# Altium PCB PCB_PCIe TX to RX.pcbdoc
Units mil, origin at the board's own origin, x right, y up, seen from the top; angles counter-clockwise.
Board outline 6470 x 3393.18 mil, 2 copper layers (Top Layer, Bottom Layer); 1 components, 132 nets, 166 pads, 0 vias.
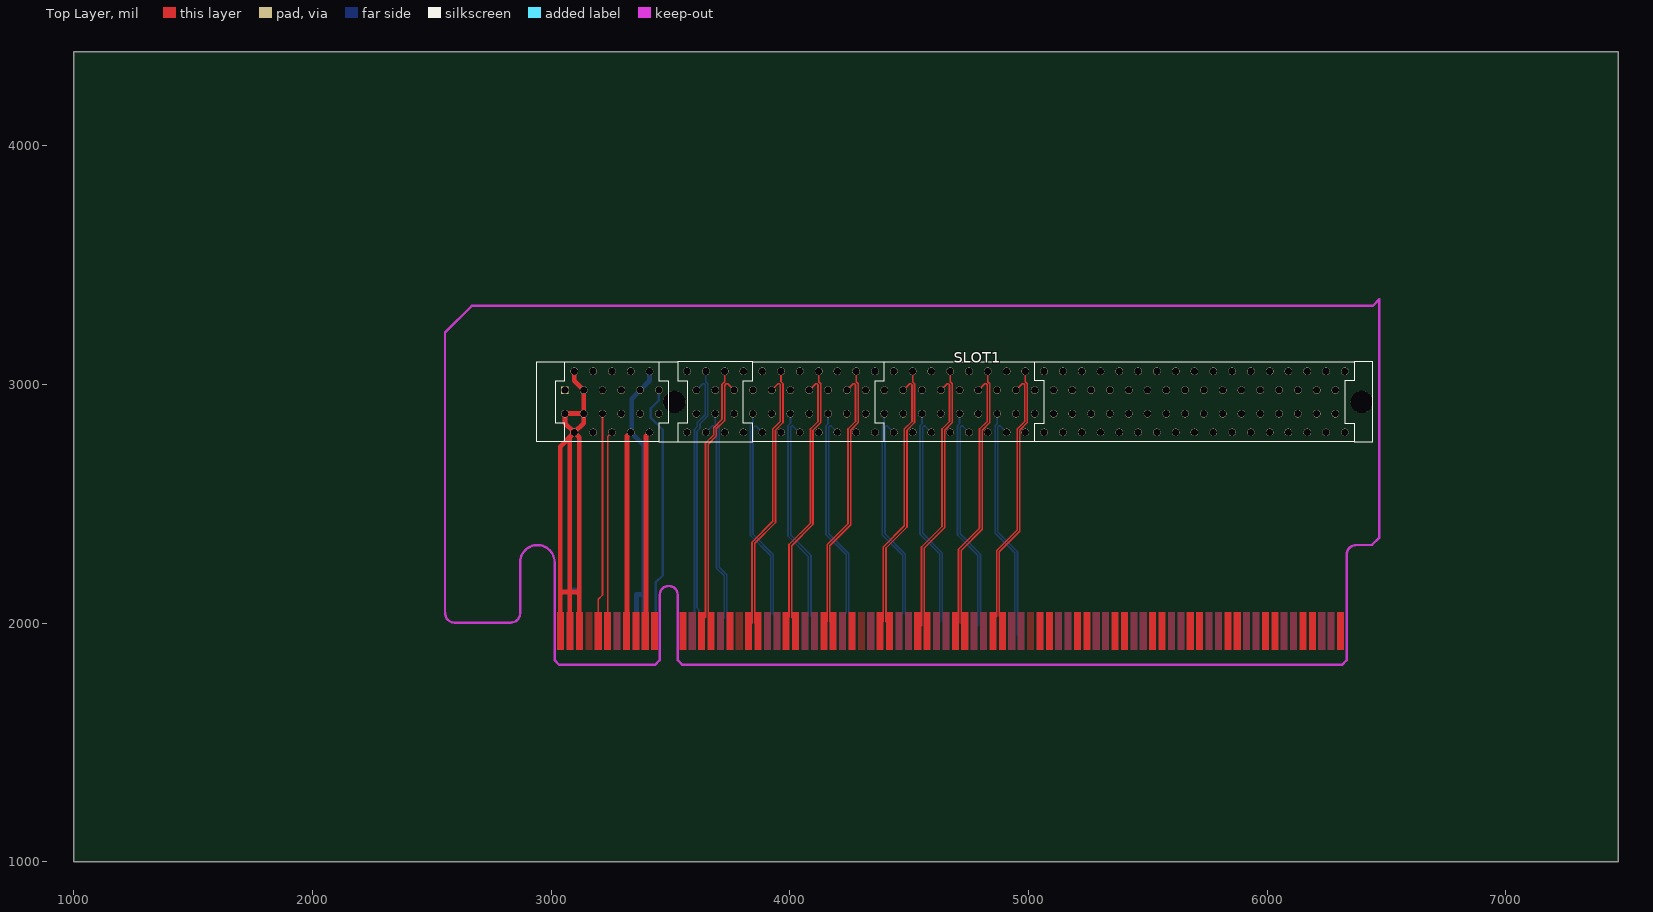
[diagram p0: Top Layer view]
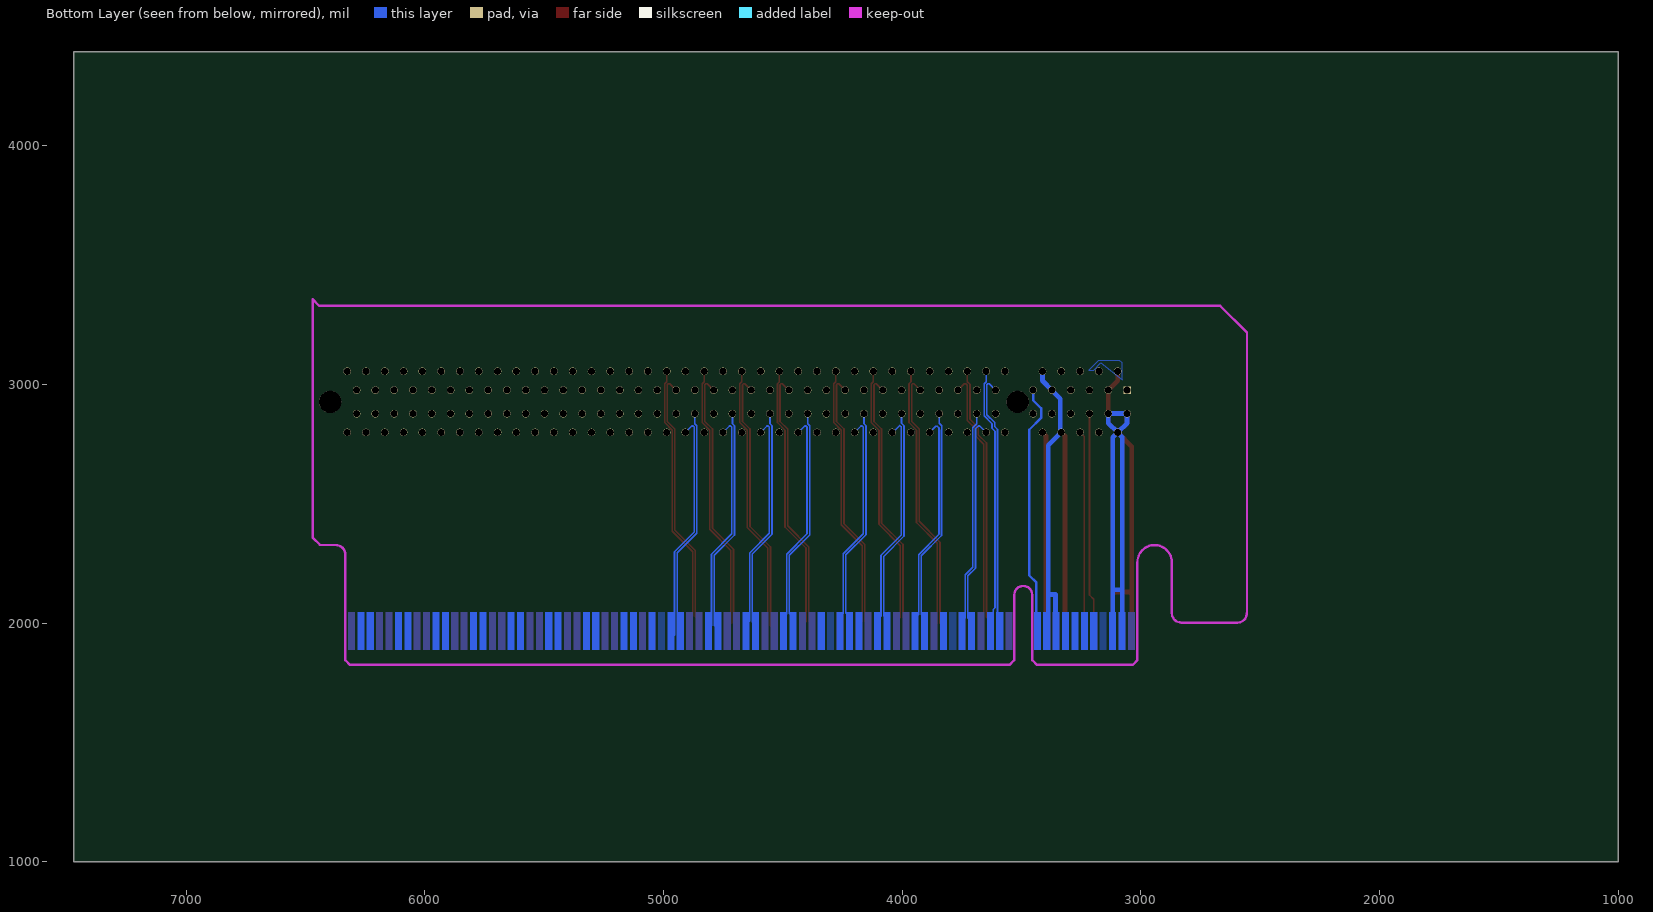
[diagram p1: Bottom Layer view, seen from below]

## Layer stack, top to bottom
Top Layer: signal copper (thickness not stored)
Dielectric: dielectric 12.6, FR-4, Dk 4.8
Bottom Layer: signal copper (thickness not stored)

## Board outline
7470,1000 1000,1000 1000,4393.18 7470,4393.18

## Components (designator, comment, footprint, x,y, rotation, side; value= is the part's Value field where it differs from the comment)
SLOT1 "GF_PCIe x16" "PCIE X16 SLOT" 4107.31,2894.25 r0 top

## Footprints (in the part's own frame and the unit in brackets; to place one, negate y for a bottom-side part, rotate by r counter-clockwise, add the part's x,y. Pads: shape width x height; smd on the part's side, far side on the other; paste and mask are expansions set on the pad)
"PCIE X16 SLOT" [mm]
  rect 0.8x0.8 hole 0.7 slot 0.705 at 0 deg: A1(-26.67,2.08)
  round 0.8 hole 0.7 slot 0.705 at 0 deg: A2(-25.67,4.08) A3(-24.67,2.08) A4(-23.67,4.08) A5(-22.67,2.08) A6(-21.67,4.08) A7(-20.67,2.08) A8(-19.67,4.08) A9(-18.67,2.08) A10(-17.67,4.08) A11(-16.67,2.08) A12(-13.67,4.08) A13(-12.67,2.08) A14(-11.67,4.08) A15(-10.67,2.08) A16(-9.67,4.08) A17(-8.67,2.08) A18(-7.67,4.08) A19(-6.67,2.08) A20(-5.67,4.08) A21(-4.67,2.08) A22(-3.67,4.08) A23(-2.67,2.08) A24(-1.67,4.08) A25(-0.67,2.08) A26(0.33,4.08) A27(1.33,2.08) A28(2.33,4.08) A29(3.33,2.08) A30(4.33,4.08) A31(5.33,2.08) A32(6.33,4.08) A33(7.33,2.08) A34(8.33,4.08) A35(9.33,2.08) A36(10.33,4.08) A37(11.33,2.08) A38(12.33,4.08) A39(13.33,2.08) A40(14.33,4.08) A41(15.33,2.08) A42(16.33,4.08) A43(17.33,2.08) A44(18.33,4.08) A45(19.33,2.08) A46(20.33,4.08) A47(21.33,2.08) A48(22.33,4.08) A49(23.33,2.08) A50(24.33,4.08) A51(25.33,2.08) A52(26.33,4.08) A53(27.33,2.08) A54(28.33,4.08) A55(29.33,2.08) A56(30.33,4.08) A57(31.33,2.08) A58(32.33,4.08) A59(33.33,2.08) A60(34.33,4.08) A61(35.33,2.08) A62(36.33,4.08) A63(37.33,2.08) A64(38.33,4.08) A65(39.33,2.08) A66(40.33,4.08) A67(41.33,2.08) A68(42.33,4.08) A69(43.33,2.08) A70(44.33,4.08) A71(45.33,2.08) A72(46.33,4.08) A73(47.33,2.08) A74(48.33,4.08) A75(49.33,2.08) A76(50.33,4.08) A77(51.33,2.08) A78(52.33,4.08) A79(53.33,2.08) A80(54.33,4.08) A81(55.33,2.08) A82(56.33,4.08) B1(-26.67,-0.42) B2(-25.67,-2.42) B3(-24.67,-0.42) B4(-23.67,-2.42) B5(-22.67,-0.42) B6(-21.67,-2.42) B7(-20.67,-0.42) B8(-19.67,-2.42) B9(-18.67,-0.42) B10(-17.67,-2.42) B11(-16.67,-0.42) B12(-13.67,-2.42) B13(-12.67,-0.42) B14(-11.67,-2.42) B15(-10.67,-0.42) B16(-9.67,-2.42) B17(-8.67,-0.42) B18(-7.67,-2.42) B19(-6.67,-0.42) B20(-5.67,-2.42) B21(-4.67,-0.42) B22(-3.67,-2.42) B23(-2.67,-0.42) B24(-1.67,-2.42) B25(-0.67,-0.42) B26(0.33,-2.42) B27(1.33,-0.42) B28(2.33,-2.42) B29(3.33,-0.42) B30(4.33,-2.42) B31(5.33,-0.42) B32(6.33,-2.42) B33(7.33,-0.42) B34(8.33,-2.42) B35(9.33,-0.42) B36(10.33,-2.42) B37(11.33,-0.42) B38(12.33,-2.42) B39(13.33,-0.42) B40(14.33,-2.42) B41(15.33,-0.42) B42(16.33,-2.42) B43(17.33,-0.42) B44(18.33,-2.42) B45(19.33,-0.42) B46(20.33,-2.42) B47(21.33,-0.42) B48(22.33,-2.42) B49(23.33,-0.42) B50(24.33,-2.42) B51(25.33,-0.42) B52(26.33,-2.42) B53(27.33,-0.42) B54(28.33,-2.42) B55(29.33,-0.42) B56(30.33,-2.42) B57(31.33,-0.42) B58(32.33,-2.42) B59(33.33,-0.42) B60(34.33,-2.42) B61(35.33,-0.42) B62(36.33,-2.42) B63(37.33,-0.42) B64(38.33,-2.42) B65(39.33,-0.42) B66(40.33,-2.42) B67(41.33,-0.42) B68(42.33,-2.42) B69(43.33,-0.42) B70(44.33,-2.42) B71(45.33,-0.42) B72(46.33,-2.42) B73(47.33,-0.42) B74(48.33,-2.42) B75(49.33,-0.42) B76(50.33,-2.42) B77(51.33,-0.42) B78(52.33,-2.42) B79(53.33,-0.42) B80(54.33,-2.42) B81(55.33,-0.42) B82(56.33,-2.42)
  round 2.35 hole 2.35 slot 2.355 at 0 deg unplated: ""(-15.02,0.83) ""(58.13,0.83)
  silkscreen extent -29.67,-3.42 59.33,5.08

## Nets (pads, with @x,y where several pads share a name; then routed paths per layer and width w, separated by ;. In a path a pad name is that pad's centre, name@x,y a point inside that pad or via, vN(x,y) a via of type N, cw(c..) or ccw(c..) an arc to the next point about the centre after c; other vN are vias at no path point)
+3.3V: SLOT1.A9 SLOT1.A10 SLOT1.B8 | length 2094.1
  Top Layer w20: 3317.31,1980 3317.31,2783.38 SLOT1.B8
  Bottom Layer w20: 3357.31,2000 3357.31,2120 3387.31,2120 3387.31,2020 ; 3387.31,2091.33 3387.31,2744.56 SLOT1.B8 3337.31,2803.38 3337.31,2940 3372.27,2974.96 SLOT1.A9 3411.64,3015.51 SLOT1.A10
+3.3VAUX: SLOT1.B10 | length 804.9
  Top Layer w20: 3397.31,2000 3397.31,2784.64 SLOT1.B10
+12V: SLOT1.A2 SLOT1.A3 SLOT1.B1 SLOT1.B2 SLOT1.B3 | length 4902
  Top Layer w20: 3037.31,2010 3037.31,2120 ; 3077.31,2000 3077.78,2130 ; 3077.34,2130 3077.34,2779.63 SLOT1.B2 ; SLOT1.A2 3096.68,3015.51 SLOT1.A3 SLOT1.B3 ; 3117.31,2000 3117.31,2120 ; 3037.31,2120 3037.31,2739.6 SLOT1.B2 ; 3037.31,2120 3047.31,2130 3107.31,2130 3117.31,2120 ; SLOT1.B2 3057.31,2838.34 SLOT1.B1 SLOT1.B3 ; SLOT1.B2 3136.05,2838.34 SLOT1.B3 ; SLOT1.B2 3117.31,2778.34 3117.31,2120
  Bottom Layer w20: 3077.31,2000 3077.31,2140 ; 3117.31,2000 3117.31,2140 ; 3077.31,2140 3077.31,2779.6 SLOT1.B2 ; 3077.31,2140 3117.31,2140 ; SLOT1.B2 3117.31,2778.34 3117.31,2140 ; SLOT1.B2 3057.31,2838.34 SLOT1.B1 SLOT1.B3 3136.05,2838.34 SLOT1.B2
GND: SLOT1.A1 SLOT1.A4 SLOT1.A12 SLOT1.A15 SLOT1.A18 SLOT1.A20 SLOT1.A23 SLOT1.A24 SLOT1.A27 SLOT1.A31 SLOT1.A33 SLOT1.A34 SLOT1.A37 SLOT1.A38 SLOT1.A41 SLOT1.A42 SLOT1.A45 SLOT1.A46 SLOT1.A49 SLOT1.A51 SLOT1.A54 SLOT1.A55 SLOT1.A58 SLOT1.A59 SLOT1.A62 SLOT1.A63 SLOT1.A66 SLOT1.A67 SLOT1.A70 SLOT1.A71 SLOT1.A74 SLOT1.A75 SLOT1.A78 SLOT1.A79 SLOT1.A82 SLOT1.B4 SLOT1.B7 SLOT1.B13 SLOT1.B16 SLOT1.B18 SLOT1.B21 SLOT1.B22 SLOT1.B25 SLOT1.B26 SLOT1.B29 SLOT1.B31 SLOT1.B32 SLOT1.B35 SLOT1.B36 SLOT1.B39 SLOT1.B40 SLOT1.B43 SLOT1.B44 SLOT1.B47 SLOT1.B48 SLOT1.B49 SLOT1.B52 SLOT1.B53 SLOT1.B56 SLOT1.B57 SLOT1.B60 SLOT1.B61 SLOT1.B64 SLOT1.B65 SLOT1.B68 SLOT1.B69 SLOT1.B72 SLOT1.B73 SLOT1.B76 SLOT1.B77 SLOT1.B80 SLOT1.B81
HSIN_0-: SLOT1.A17 | length 1074.4
  Top Layer w7: 3672.31,2010 3657.31,2025 3657.31,2750 3691.2,2783.89 3691.2,2813.89 3726.35,2849.04 3726.35,2995.96 3733.35,3002.96 3739.15,3002.96 SLOT1.A17
HSIN_1-: SLOT1.A22 | length 1107.6
  Top Layer w7: 3852.31,2000 3852.31,2334.44 3939.57,2421.7 3939.57,2808.61 3971.16,2840.2 3971.16,3003.41 3962.82,3011.76 SLOT1.A22
HSIN_2-: SLOT1.A26 | length 1097.7
  Top Layer w7: 4017.31,2015 4007.31,2025 4007.31,2324.44 4097.05,2414.18 4097.05,2808.61 4128.64,2840.2 4128.64,3003.41 4120.3,3011.76 SLOT1.A26
HSIN_3-: SLOT1.A30 | length 1102.6
  Top Layer w7: 4167.31,2005 4167.31,2324.44 4254.53,2411.66 4254.53,2808.61 4286.12,2840.2 4286.12,3003.41 4277.78,3011.76 SLOT1.A30
HSIN_4-: SLOT1.A36 | length 1103.1
  Top Layer w7: 4402.31,2005 4402.31,2314.44 4490.75,2402.89 4490.75,2808.61 4522.34,2840.2 4522.34,3003.41 4514,3011.76 SLOT1.A36
HSIN_5-: SLOT1.A40 | length 1117
  Top Layer w7: 4562.31,1990 4562.31,2314.44 4648.23,2400.36 4648.23,2808.61 4679.82,2840.2 4679.82,3003.41 4671.48,3011.76 SLOT1.A40
HSIN_6-: SLOT1.A44 | length 1129.3
  Top Layer w7: 4732.31,1985 4717.31,2000 4717.31,2304.44 4805.71,2392.85 4805.71,2808.61 4837.31,2840.2 4837.31,3003.41 4828.96,3011.76 SLOT1.A44
HSIN_7-: SLOT1.A48 | length 1098.2
  Top Layer w7: 4892.31,2015 4877.31,2030 4877.31,2299.44 4963.19,2385.33 4963.19,2808.61 4994.78,2840.2 4994.78,3003.41 4986.44,3011.76 SLOT1.A48
HSIN_8-: 
HSIN_9-: 
HSIN_10-: 
HSIN_11-: 
HSIN_12-: 
HSIN_13-: 
HSIN_14-: 
HSIN_15-: 
HSIP_0+: SLOT1.A16 | length 1076.9
  Top Layer w7: 3637.31,2015 3646.31,2024 3646.31,2754.56 3680.2,2788.45 3680.2,2818.45 3715.35,2853.6 3715.35,3000.51 3726.6,3011.76 SLOT1.A16
HSIP_1+: SLOT1.A21 | length 1097.6
  Top Layer w7: 3841.31,2000 3841.31,2339 3928.57,2426.26 3928.57,2813.16 3960.16,2844.75 3960.16,2998.86 3956.06,3002.96 3950.26,3002.96 SLOT1.A21
HSIP_2+: SLOT1.A25 | length 1073.6
  Top Layer w7: 3996.31,2025 3996.31,2329 4086.05,2418.74 4086.05,2813.16 4117.64,2844.75 4117.64,2998.86 4113.54,3002.96 4107.74,3002.96 SLOT1.A25
HSIP_3+: SLOT1.A29 | length 1092.6
  Top Layer w7: 4156.31,2005 4156.31,2329 4243.53,2416.22 4243.53,2813.16 4275.12,2844.75 4275.12,2998.86 4271.02,3002.96 4265.22,3002.96 SLOT1.A29
HSIP_4+: SLOT1.A35 | length 1093.1
  Top Layer w7: 4391.31,2005 4391.31,2319 4479.75,2407.44 4479.75,2813.16 4511.34,2844.75 4511.34,2998.86 4507.24,3002.96 4501.44,3002.96 SLOT1.A35
HSIP_5+: SLOT1.A39 | length 1107.1
  Top Layer w7: 4551.31,1990 4551.31,2319 4637.23,2404.92 4637.23,2813.16 4668.82,2844.75 4668.82,2998.86 4664.72,3002.96 4658.93,3002.96 SLOT1.A39
HSIP_6+: SLOT1.A43 | length 1098.1
  Top Layer w7: 4706.31,2000 4706.31,2309 4794.71,2397.4 4794.71,2813.16 4826.31,2844.75 4826.31,2998.86 4822.2,3002.96 4816.41,3002.96 SLOT1.A43
HSIP_7+: SLOT1.A47 | length 1087.8
  Top Layer w7: 4852.31,2015 4866.31,2029 4866.31,2304 4952.19,2389.88 4952.19,2813.16 4983.78,2844.75 4983.78,2998.86 4979.69,3002.96 4973.89,3002.96 SLOT1.A47
HSIP_8+: 
HSIP_9+: 
HSIP_10+: 
HSIP_11+: 
HSIP_12+: 
HSIP_13+: 
HSIP_14+: 
HSIP_15+: 
HSON_0-: SLOT1.B15 | length 892.6
  Bottom Layer w7: SLOT1.B15 3687.23,2834.59 3703.35,2818.47 3703.35,2234.52 3735.42,2202.45 3735.42,2021.89 3747.31,2010
HSON_1-: SLOT1.B20 | length 884.9
  Bottom Layer w7: SLOT1.B20 3858.32,2824.73 3852.52,2824.73 3845.59,2817.79 3845.59,2371.72 3930.51,2286.8 3930.51,2036.8 3942.31,2025
HSON_2-: SLOT1.B24 | length 901.2
  Bottom Layer w7: SLOT1.B24 4038.34,2798.97 4009.17,2828.14 4003.07,2822.03 4003.07,2369.24 4088.41,2283.9 4088.41,2028.9 4102.31,2015
HSON_3-: SLOT1.B28 | length 880.6
  Bottom Layer w7: SLOT1.B28 4172.22,2825.79 4166.42,2825.79 4162.32,2821.69 4162.32,2374.99 4246.61,2290.7 4246.61,2040.7 4257.31,2030
HSON_4-: SLOT1.B34 | length 894.2
  Bottom Layer w7: SLOT1.B34 4408.44,2825.79 4402.64,2825.79 4398.54,2821.69 4398.54,2373.77 4483.31,2289 4483.31,2039 4502.31,2020
HSON_5-: SLOT1.B38 | length 909
  Bottom Layer w7: SLOT1.B38 4565.92,2825.79 4560.12,2825.79 4556.02,2821.69 4556.02,2376.29 4638.31,2294 4638.31,2009 4647.31,2000
HSON_6-: SLOT1.B42 | length 916.3
  Bottom Layer w7: SLOT1.B42 4723.4,2825.79 4717.6,2825.79 4713.5,2821.69 4713.5,2373.81 4798.31,2289 4798.31,1990
HSON_7-: SLOT1.B46 | length 955.3
  Bottom Layer w7: SLOT1.B46 4880.88,2825.79 4875.09,2825.79 4870.98,2821.69 4870.98,2381.32 4953.31,2299 4953.31,1950
HSON_8-: 
HSON_9-: 
HSON_10-: 
HSON_11-: 
HSON_12-: 
HSON_13-: 
HSON_14-: 
HSON_15-: 
HSOP_0+: SLOT1.B14 | length 875.7
  Bottom Layer w7: SLOT1.B14 3674.67,2825.79 3680.47,2825.79 3692.35,2813.91 3692.35,2229.96 3724.42,2197.89 3724.42,2022.11 3717.31,2015
HSOP_1+: SLOT1.B19 | length 890.2
  Bottom Layer w7: SLOT1.B19 3844.71,2836.71 3834.42,2826.43 3834.42,2809.03 3834.59,2808.87 3834.59,2367.17 3919.51,2282.24 3919.51,2037.2 3912.31,2030
HSOP_2+: SLOT1.B23 | length 894.5
  Bottom Layer w7: SLOT1.B23 4002.19,2836.71 3991.9,2826.43 3991.9,2809.03 3992.07,2808.87 3992.07,2364.69 4077.41,2279.34 4077.41,2030.1 4072.31,2025
HSOP_3+: SLOT1.B27 | length 884.5
  Bottom Layer w7: SLOT1.B27 4159.67,2834.59 4151.32,2826.25 4151.32,2370.43 4235.61,2286.15 4235.61,2043.3 4227.31,2035
HSOP_4+: SLOT1.B33 | length 897.5
  Bottom Layer w7: SLOT1.B33 4395.89,2834.59 4387.54,2826.25 4387.54,2369.21 4472.31,2284.44 4472.31,2040 4457.31,2025
HSOP_5+: SLOT1.B37 | length 924.4
  Bottom Layer w7: SLOT1.B37 4553.37,2834.59 4545.02,2826.25 4545.02,2371.73 4627.31,2289.44 4627.31,2005 4617.31,1995
HSOP_6+: SLOT1.B41 | length 926.3
  Bottom Layer w7: SLOT1.B41 4710.85,2834.59 4702.5,2826.25 4702.5,2369.25 4787.31,2284.44 4787.31,1990
HSOP_7+: SLOT1.B45 | length 965.3
  Bottom Layer w7: SLOT1.B45 4868.33,2834.59 4859.98,2826.25 4859.98,2376.77 4942.31,2294.44 4942.31,1950
HSOP_8+: 
HSOP_9+: 
HSOP_10+: 
HSOP_11+: 
HSOP_12+: 
HSOP_13+: 
HSOP_14+: 
HSOP_15+: 
PERST#: SLOT1.A11 | length 1013.2
  Bottom Layer w10: 3437.31,2010 3437.31,2170 3467.31,2200 3467.31,2810 3417.31,2860 3417.31,2900 3451.01,2933.7 SLOT1.A11
PIN1_A5: 
PIN1_A6: 
PIN1_A7: 
PIN1_A8: 
PIN1_A19: 
PIN1_A28: 
PIN1_A32: 
PIN1_A50: 
PIN1_B9: 
PIN1_B12: 
PIN1_B17: 
PIN1_B30: 
PIN1_B82: 
REFCLK+: SLOT1.A13 | length 1077.1
  Bottom Layer w7: 3600,1990 3600,2811.16 3612.34,2823.5 3612.34,2840.19 3645.2,2873.06 3645.2,2998.86 3641.11,3002.96 3635.31,3002.96 SLOT1.A13
REFCLK-: SLOT1.A14 | length 1097.8
  Bottom Layer w7: 3618.05,1982.22 3618.05,2056.59 3611,2063.64 3611,2803.47 3623.34,2815.81 3623.34,2835.64 3656.2,2868.51 3656.2,3003.41 3647.86,3011.76 SLOT1.A14
SLOT1_A5: SLOT1.A5
SLOT1_A6: SLOT1.A6
SLOT1_A7: SLOT1.A7
SLOT1_A8: SLOT1.A8
SLOT1_A19: SLOT1.A19
SLOT1_A28: SLOT1.A28
SLOT1_A32: SLOT1.A32
SLOT1_A50: SLOT1.A50
SLOT1_A52: SLOT1.A52
SLOT1_A53: SLOT1.A53
SLOT1_A56: SLOT1.A56
SLOT1_A57: SLOT1.A57
SLOT1_A60: SLOT1.A60
SLOT1_A61: SLOT1.A61
SLOT1_A64: SLOT1.A64
SLOT1_A65: SLOT1.A65
SLOT1_A68: SLOT1.A68
SLOT1_A69: SLOT1.A69
SLOT1_A72: SLOT1.A72
SLOT1_A73: SLOT1.A73
SLOT1_A76: SLOT1.A76
SLOT1_A77: SLOT1.A77
SLOT1_A80: SLOT1.A80
SLOT1_A81: SLOT1.A81
SLOT1_B9: SLOT1.B9
SLOT1_B12: SLOT1.B12
SLOT1_B17: SLOT1.B17
SLOT1_B30: SLOT1.B30
SLOT1_B50: SLOT1.B50
SLOT1_B51: SLOT1.B51
SLOT1_B54: SLOT1.B54
SLOT1_B55: SLOT1.B55
SLOT1_B58: SLOT1.B58
SLOT1_B59: SLOT1.B59
SLOT1_B62: SLOT1.B62
SLOT1_B63: SLOT1.B63
SLOT1_B66: SLOT1.B66
SLOT1_B67: SLOT1.B67
SLOT1_B70: SLOT1.B70
SLOT1_B71: SLOT1.B71
SLOT1_B74: SLOT1.B74
SLOT1_B75: SLOT1.B75
SLOT1_B78: SLOT1.B78
SLOT1_B79: SLOT1.B79
SLOT1_B82: SLOT1.B82
SMBDAT: SLOT1.B6 | length 785.9
  Top Layer w7: 3237.31,2020 3237.31,2782.12 SLOT1.B6
SMCLK: SLOT1.B5 | length 885
  Top Layer w7: 3197.31,2000 3197.31,2100 3214.79,2117.48 SLOT1.B5
WAKE#: SLOT1.B11
pads on no net: SLOT1.

## Polygon pours and split planes (outlines as drawn)
+12V on Bottom Layer (solid): 3077.31,3020 3077.31,3090 3087.31,3100 3177.31,3100 3217.31,3060 3197.31,3060 3167.31,3090
GND on Top Layer (solid): 2030,3820 6280,3820 6830,3270 6830,1790 6730,1690 1600,1690 1500,1790
GND on Bottom Layer (solid): 2300,3640 6830,3640 6970,3500 6970,1890 6580,1500 2490,1500 1750,2240

## Keep-outs
Keep-Out Layer:
  lines w10: 2555.31,2041.53 ccw(c2594.68,2041.53) 2594.68,2002.16 ; 2830.5,2002.16 ccw(c2830.5,2041.53) 2869.87,2041.53 ; 2869.87,2254.92 cw(c2941.92,2254.92) 3013.97,2254.92 ; 3454.91,2118.3 cw(c3492.31,2118.3) 3529.72,2118.3 ; 6332.87,2287.6 cw(c6372.24,2287.6) 6372.24,2326.97

## Other copper
Top Layer:
  region net +12V: 3025.8,1888.88 3053.36,1888.88 3053.36,2046.09 3025.8,2046.09
  region net +12V: 3065.18,1888.88 3092.74,1888.88 3092.74,2046.09 3065.18,2046.09
  region net +12V: 3104.55,1888.88 3132.11,1888.88 3132.11,2046.09 3104.55,2046.09
  region net SMCLK: 3183.28,1888.88 3210.84,1888.88 3210.84,2046.09 3183.28,2046.09
  region net SMBDAT: 3222.66,1888.88 3250.22,1888.88 3250.22,2046.09 3222.66,2046.09
  region net +3.3V: 3301.39,1888.88 3328.95,1888.88 3328.95,2046.09 3301.39,2046.09
  region net PIN1_B9: 3340.78,1888.88 3368.32,1888.88 3368.32,2046.09 3340.78,2046.09
  region net +3.3VAUX: 3380.14,1888.88 3407.7,1888.88 3407.7,2046.09 3380.14,2046.09
  region net WAKE#: 3419.51,1888.88 3447.07,1888.88 3447.07,2046.09 3419.51,2046.09
  region net PIN1_B12: 3537.62,1888.88 3565.18,1888.88 3565.18,2046.09 3537.62,2046.09
  region net HSIP_0+: 3616.36,1888.88 3643.91,1888.88 3643.91,2046.09 3616.36,2046.09
  region net HSIN_0-: 3655.74,1888.88 3683.28,1888.88 3683.28,2046.09 3655.74,2046.09
  region net PIN1_B17: 3734.47,1888.88 3762.03,1888.88 3762.03,2046.09 3734.47,2046.09
  region net HSIP_1+: 3813.22,1888.88 3840.78,1888.88 3840.78,2046.09 3813.22,2046.09
  region net HSIN_1-: 3852.59,1888.88 3880.14,1888.88 3880.14,2046.09 3852.59,2046.09
  region net HSIP_2+: 3970.7,1888.88 3998.26,1888.88 3998.26,2046.09 3970.7,2046.09
  region net HSIN_2-: 4010.07,1888.88 4037.62,1888.88 4037.62,2046.09 4010.07,2046.09
  region net HSIP_3+: 4128.18,1888.88 4155.73,1888.88 4155.73,2046.09 4128.18,2046.09
  region net HSIN_3-: 4167.55,1888.88 4195.1,1888.88 4195.1,2046.09 4167.55,2046.09
  region net PIN1_B30: 4246.28,1888.88 4273.85,1888.88 4273.85,2046.09 4246.28,2046.09
  region net HSIP_4+: 4364.4,1888.88 4391.95,1888.88 4391.95,2046.09 4364.4,2046.09
  region net HSIN_4-: 4403.77,1888.88 4431.32,1888.88 4431.32,2046.09 4403.77,2046.09
  region net HSIP_5+: 4521.88,1888.88 4549.44,1888.88 4549.44,2046.09 4521.88,2046.09
  region net HSIN_5-: 4561.24,1888.88 4588.81,1888.88 4588.81,2046.09 4561.24,2046.09
  region net HSIP_6+: 4679.35,1888.88 4706.91,1888.88 4706.91,2046.09 4679.35,2046.09
  region net HSIN_6-: 4718.73,1888.88 4746.28,1888.88 4746.28,2046.09 4718.73,2046.09
  region net HSIP_7+: 4836.84,1888.88 4864.4,1888.88 4864.4,2046.09 4836.84,2046.09
  region net HSIN_7-: 4876.2,1888.88 4903.77,1888.88 4903.77,2046.09 4876.2,2046.09
  region net HSIP_8+: 5033.69,1888.88 5061.24,1888.88 5061.24,2046.09 5033.69,2046.09
  region net HSIN_8-: 5073.06,1888.88 5100.61,1888.88 5100.61,2046.09 5073.06,2046.09
  region net HSIP_9+: 5191.16,1888.88 5218.73,1888.88 5218.73,2046.09 5191.16,2046.09
  region net HSIN_9-: 5230.53,1888.88 5258.1,1888.88 5258.1,2046.09 5230.53,2046.09
  region net HSIN_10-: 5388.02,1888.88 5415.57,1888.88 5415.57,2046.09 5388.02,2046.09
  region net HSIP_11+: 5506.12,1888.88 5533.69,1888.88 5533.69,2046.09 5506.12,2046.09
  region net HSIN_11-: 5545.49,1888.88 5573.06,1888.88 5573.06,2046.09 5545.49,2046.09
  region net HSIP_12+: 5663.6,1888.88 5691.16,1888.88 5691.16,2046.09 5663.6,2046.09
  region net HSIN_12-: 5702.98,1888.88 5730.53,1888.88 5730.53,2046.09 5702.98,2046.09
  region net HSIP_13+: 5821.09,1888.88 5848.65,1888.88 5848.65,2046.09 5821.09,2046.09
  region net HSIN_13-: 5860.45,1888.88 5888.02,1888.88 5888.02,2046.09 5860.45,2046.09
  region net HSIP_14+: 5978.56,1888.88 6006.12,1888.88 6006.12,2046.09 5978.56,2046.09
  region net HSIN_14-: 6017.94,1888.88 6045.49,1888.88 6045.49,2046.09 6017.94,2046.09
  region net HSIP_15+: 6136.05,1888.88 6163.6,1888.88 6163.6,2046.09 6136.05,2046.09
  region net HSIN_15-: 6175.41,1888.88 6202.98,1888.88 6202.98,2046.09 6175.41,2046.09
  region net PIN1_B82: 6293.52,1888.88 6321.09,1888.88 6321.09,2046.09 6293.52,2046.09
  region net HSIP_10+: 5348.65,1888.88 5376.2,1888.88 5376.2,2046.09 5348.65,2046.09
Bottom Layer:
  region net HSON_15-: 6254.15,1888.88 6281.72,1888.88 6281.72,2046.09 6254.15,2046.09
  region net +12V: 3065.18,1888.88 3092.74,1888.88 3092.74,2046.09 3065.18,2046.09
  region net +12V: 3104.55,1888.88 3132.11,1888.88 3132.11,2046.09 3104.55,2046.09
  region net PIN1_A5: 3183.28,1888.88 3210.84,1888.88 3210.84,2046.09 3183.28,2046.09
  region net PIN1_A6: 3222.66,1888.88 3250.22,1888.88 3250.22,2046.09 3222.66,2046.09
  region net PIN1_A7: 3262.03,1888.88 3289.59,1888.88 3289.59,2046.09 3262.03,2046.09
  region net PIN1_A8: 3301.39,1888.88 3328.95,1888.88 3328.95,2046.09 3301.39,2046.09
  region net +3.3V: 3340.78,1888.88 3368.32,1888.88 3368.32,2046.09 3340.78,2046.09
  region net +3.3V: 3380.14,1888.88 3407.7,1888.88 3407.7,2046.09 3380.14,2046.09
  region net PERST#: 3419.51,1888.88 3447.07,1888.88 3447.07,2046.09 3419.51,2046.09
  region net REFCLK+: 3576.99,1888.88 3604.55,1888.88 3604.55,2046.09 3576.99,2046.09
  region net REFCLK-: 3616.36,1888.88 3643.91,1888.88 3643.91,2046.09 3616.36,2046.09
  region net HSOP_0+: 3695.11,1888.88 3722.66,1888.88 3722.66,2046.09 3695.11,2046.09
  region net HSON_0-: 3734.47,1888.88 3762.03,1888.88 3762.03,2046.09 3734.47,2046.09
  region net PIN1_A19: 3813.22,1888.88 3840.78,1888.88 3840.78,2046.09 3813.22,2046.09
  region net HSOP_1+: 3891.95,1888.88 3919.51,1888.88 3919.51,2046.09 3891.95,2046.09
  region net HSON_1-: 3931.32,1888.88 3958.89,1888.88 3958.89,2046.09 3931.32,2046.09
  region net HSOP_2+: 4049.43,1888.88 4076.99,1888.88 4076.99,2046.09 4049.43,2046.09
  region net HSON_2-: 4088.8,1888.88 4116.36,1888.88 4116.36,2046.09 4088.8,2046.09
  region net PIN1_A28: 4167.55,1888.88 4195.1,1888.88 4195.1,2046.09 4167.55,2046.09
  region net HSOP_3+: 4206.91,1888.88 4234.48,1888.88 4234.48,2046.09 4206.91,2046.09
  region net HSON_3-: 4246.28,1888.88 4273.85,1888.88 4273.85,2046.09 4246.28,2046.09
  region net PIN1_A32: 4325.02,1888.88 4352.59,1888.88 4352.59,2046.09 4325.02,2046.09
  region net HSOP_4+: 4443.14,1888.88 4470.69,1888.88 4470.69,2046.09 4443.14,2046.09
  region net HSON_4-: 4482.51,1888.88 4510.06,1888.88 4510.06,2046.09 4482.51,2046.09
  region net HSOP_5+: 4600.61,1888.88 4628.18,1888.88 4628.18,2046.09 4600.61,2046.09
  region net HSON_5-: 4639.98,1888.88 4667.55,1888.88 4667.55,2046.09 4639.98,2046.09
  region net HSOP_6+: 4758.1,1888.88 4785.65,1888.88 4785.65,2046.09 4758.1,2046.09
  region net HSON_6-: 4797.47,1888.88 4825.02,1888.88 4825.02,2046.09 4797.47,2046.09
  region net HSOP_7+: 4915.57,1888.88 4943.14,1888.88 4943.14,2046.09 4915.57,2046.09
  region net HSON_7-: 4954.94,1888.88 4982.51,1888.88 4982.51,2046.09 4954.94,2046.09
  region net PIN1_A50: 5033.69,1888.88 5061.24,1888.88 5061.24,2046.09 5033.69,2046.09
  region net HSOP_8+: 5112.43,1888.88 5139.98,1888.88 5139.98,2046.09 5112.43,2046.09
  region net HSON_8-: 5151.8,1888.88 5179.35,1888.88 5179.35,2046.09 5151.8,2046.09
  region net HSOP_9+: 5269.9,1888.88 5297.47,1888.88 5297.47,2046.09 5269.9,2046.09
  region net HSON_9-: 5309.27,1888.88 5336.84,1888.88 5336.84,2046.09 5309.27,2046.09
  region net HSOP_10+: 5427.39,1888.88 5454.94,1888.88 5454.94,2046.09 5427.39,2046.09
  region net HSON_10-: 5466.76,1888.88 5494.31,1888.88 5494.31,2046.09 5466.76,2046.09
  region net HSOP_11+: 5584.86,1888.88 5612.43,1888.88 5612.43,2046.09 5584.86,2046.09
  region net HSON_11-: 5624.23,1888.88 5651.8,1888.88 5651.8,2046.09 5624.23,2046.09
  region net HSOP_12+: 5742.35,1888.88 5769.9,1888.88 5769.9,2046.09 5742.35,2046.09
  region net HSON_12-: 5781.72,1888.88 5809.27,1888.88 5809.27,2046.09 5781.72,2046.09
  region net HSOP_13+: 5899.82,1888.88 5927.39,1888.88 5927.39,2046.09 5899.82,2046.09
  region net HSON_13-: 5939.19,1888.88 5966.76,1888.88 5966.76,2046.09 5939.19,2046.09
  region net HSOP_14+: 6057.31,1888.88 6084.86,1888.88 6084.86,2046.09 6057.31,2046.09
  region net HSON_14-: 6096.68,1888.88 6124.23,1888.88 6124.23,2046.09 6096.68,2046.09
  region net HSOP_15+: 6214.78,1888.88 6242.35,1888.88 6242.35,2046.09 6214.78,2046.09

## Silkscreen, mask and mechanical layers (free items; w line width, h text height)
Top Paste:
  drawing of 82 lines, arcs and shapes, not listed
Bottom Paste:
  drawing of 82 lines, arcs and shapes, not listed
Top Solder:
  drawing of 82 lines, arcs and shapes, not listed
Bottom Solder:
  drawing of 82 lines, arcs and shapes, not listed
Mechanical 1:
  lines w0.5: 4052.42,3890.93 4054.42,3892.93 ; 4545.15,2855.59 4547.15,2857.59
Document:
  lines w0.1: 4234,2695.59 4236,2697.59